# Altium PCB NANO33BLE.PcbDoc (part 2 of 2)
Units mm, origin at the board's own origin, x right, y up, seen from the top; angles counter-clockwise.
Board outline 43.18 x 17.78 mm, 4 copper layers (TOP, GND, SIG, BOTTOM), stack 1.586 mm thick; 73 components, 66 nets, 343 pads, 193 vias.
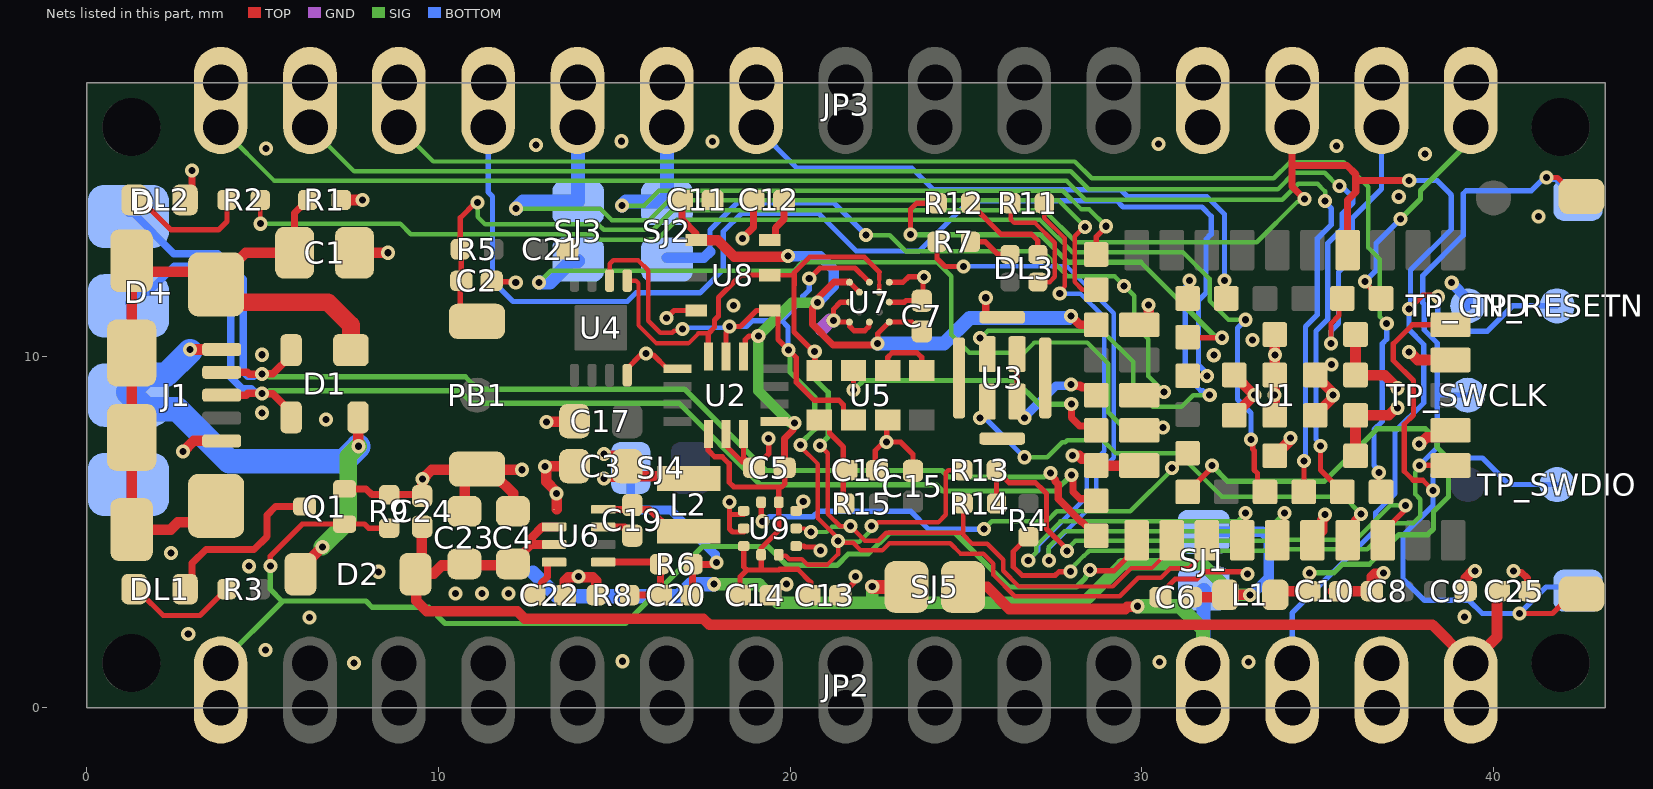
[diagram p4: the nets of this part, all layers, seen from the top]

## Via types
v1: diameter 0.4, hole 0.2, TOP to BOTTOM, tented both sides, 193 vias

## Nets (pads, with @x,y where several pads share a name; then routed paths per layer and width w, separated by ;. In a path a pad name is that pad's centre, name@x,y a point inside that pad or via, vN(x,y) a via of type N, cw(c..) or ccw(c..) an arc to the next point about the centre after c; other vN are vias at no path point) (continued)
D6~: JP3.9 U1.41 | length 16.8
  TOP w0.15: v1(32.352,12.149) 32.352,11.69 U1.41@32.402,11.64
  BOTTOM w0.15: JP3.9@19.035,16.51 20.202,15.343 23.461,15.343 24.073,14.732 29.398,14.732 29.591,14.538 31.847,14.538 32.352,14.034 v1(32.352,12.149)
D7: JP3.10 SJ2.2 U1.47 | length 18.9
  TOP w0.127: JP3.10@16.403,16.418 JP3.10@16.495,16.51
  TOP w0.15: U1.47@28.702,12.89 28.702,13.392 28.986,13.676 v1(28.986,13.694)
  SIG w0.127: v1(15.216,14.283) 15.853,14.283 16.274,14.704 27.753,14.704 28.285,14.172 28.508,14.172 v1(28.986,13.694)
  BOTTOM w0.4: v1(15.216,14.283) 15.333,14.4 SJ2.2@16.5,14.4 ; JP3.10@16.495,16.51 16.498,16.507 SJ2.2@16.498,14.402
D8: JP3.11 SJ3.2 U1.48 | length 23.2
  TOP w0.127: v1(28.387,13.678) 28.359,13.678 28.091,13.41 28.091,12.109 28.311,11.89 U1.48@28.702,11.89
  SIG w0.127: v1(12.205,14.195) 14.605,14.195 14.931,13.869 15.992,13.869 16.55,14.427 27.639,14.427 v1(28.387,13.678)
  BOTTOM w0.4: v1(12.205,14.195) 12.41,14.4 13.975,14.4 13.965,14.41 13.965,16.5 JP3.11@13.955,16.51
D9~: JP3.12 U1.44 | length 33.3
  TOP w0.15: U1.44@31.302,9.44 v1(31.852,9.44)
  BOTTOM w0.15: JP3.12@11.415,16.51 11.415,14.665 11.539,14.541 11.539,12.135 12.121,11.553 15.371,11.553 15.622,11.804 16.781,11.804 16.784,11.8 17.441,11.8 18.098,12.457 18.098,13.535 18.623,14.06 18.775,14.06 20.814,14.06 21.883,12.991 23.672,12.991 25.1,14.419 29.287,14.419 29.467,14.238 31.712,14.238 31.973,13.978 31.973,13.468 31.826,13.321 31.826,11.791 31.615,11.58 31.615,9.745 31.852,9.508 v1(31.852,9.44)
D10~: JP3.13 U1.36 | length 37.8
  TOP w0.15: v1(36.738,6.687) 36.738,6.204 U1.36@36.802,6.14
  SIG w0.127: JP3.13@8.875,16.51 9.851,15.535 14.359,15.535 16.091,15.535 28.098,15.535 28.576,15.056 33.755,15.056 34.212,15.513 35.741,15.513 36.438,14.816 36.438,13.088 36.765,12.761 36.765,11.127 v1(36.964,10.928)
  BOTTOM w0.15: v1(36.738,6.687) 36.738,6.755 36.599,6.893 36.599,7.911 36.839,8.15 36.839,10.359 36.964,10.484 v1(36.964,10.928)
GND: C1.1 C2.2 C3.1 C4.1 C5.2 C6.2 C7.1 C8.1 C9.2 C10.2 C11.2 C12.2 C13.2 C14.2 C15.1 C16.1 C17.1 C21.1 C22.1 C23.1 C24.2 C25.1 DL2.C J1.5 JP2.14 JP3.4 pad.USB_P@1.189,6.35 PB1.1 Q1.S R1.1 R8.1 R9.1 TP_GND.X U1.6 U1.12 U1.14 U1.26 U1.30 U1.53 U1.GND1 U1.GND2 U1.GND3 U1.GND4 U1.GND5 U1.GND6 U1.GND7 U1.GND8 U1.GND9 U1.GND10 U1.GND11 U1.GND12 U2.1 U2.6 U2.7 U3.5 U4.4 U5.6 U6.1 U7.A5 U7.C1 U7.C5 U7.E1 U7.E3 U8.6 U9.3 U9.5 U9.8 U9.9 | length 63.3
  TOP w0.15: C2.2@11.52,12.14 11.545,12.115 12.175,12.115 v1(12.2,12.09) ; U4.4@15.37,9.46 15.37,9.65 15.751,10.031 15.851,10.031 v1(15.899,10.079) 15.947,10.031 16.117,10.031 16.508,9.64 U2.1@17.002,9.64 ; v1(16.48,11.079) 16.702,11.3 U8.6@17.027,11.3 ; U2.6@18.177,7.79 18.227,7.74 18.227,7.405 18.639,6.993 C5.2@18.811,6.993 ; v1(18.28,5.85) 18.277,5.848 18.277,5.507 ; U2.7@18.678,7.79 18.678,7.127 C5.2@18.811,6.993 ; U9.9@18.682,5 18.365,5 18.277,5.088 18.277,5.507 ; U9.8@18.682,5.5 18.284,5.5 18.277,5.507 ; C5.2@18.878,6.993 C5.2@18.811,6.993 ; v1(19.391,7.664) 19.391,7.216 19,6.825 C5.2@18.977,6.825 18.977,6.827 C5.2@18.811,6.993 ; C14.2@19.447,3.205 19.513,3.205 19.776,3.468 19.853,3.468 v1(19.901,3.516) ; U9.3@20.172,4.6 20.396,4.6 20.421,4.575 20.702,4.575 20.801,4.476 v1(20.869,4.476) ; U9.5@20.172,5.6 20.197,5.6 20.327,5.73 20.327,5.817 v1(20.375,5.865) ; C13.2@21.426,3.205 21.451,3.205 21.812,3.566 21.812,3.684 v1(21.86,3.732) ; U7.E1@21.687,10.97 21.274,10.97 v1(21.232,11.012) 21.232,11.333 21.434,11.535 U7.C1@21.688,11.535 ; U7.E1@21.688,10.969 21.688,10.854 21.82,10.721 22.121,10.721 22.244,10.844 U7.E3@22.244,10.959 ; U7.E3@22.231,10.959 U7.E3@22.244,10.959 ; U7.E3@22.254,10.969 U7.E3@22.244,10.959 ; C16.1@22.423,6.825 22.423,7.315 22.617,7.508 22.629,7.508 22.677,7.557 23.144,7.557 23.494,7.207 C15.1@23.494,6.74 ; v1@22.75,7.557 22.75,8.167 U5.6@22.774,8.19 ; U7.C5@22.82,11.535 23.247,11.535 23.297,11.585 23.735,11.585 C7.1@23.745,11.575 23.779,11.609 23.779,12.221 v1(23.813,12.255) 23.366,12.255 23.212,12.101 U7.A5@22.82,12.101 ; U1.53@28.677,6.915 U1.53@28.702,6.89 ; C6.2@30.53,3.148 30.723,3.341 30.723,3.435 30.951,3.663 31.56,3.663 31.77,3.873 32.953,3.873 v1@33.009,3.816
  TOP w0.2: DL2.C@3,14.44 v1(3,15.275) ; Q1.S@7.335,6.225 7.944,6.225 8.109,6.06 R9.1@8.6,6.06 9.546,6.06 9.548,6.06 9.546,6.061 9.544,6.064 9.544,6.504 9.546,6.507 v1(9.548,6.508) ; v1(18.65,13.35) 18.65,13.357 18.957,13.664 C12.2@18.957,14.44 ; U3.5@25.563,11.149 v1@25.563,11.645 ; U3.5@25.755,11.106 U3.5@26.23,11.106 ; v1(40.57,3.89) 40.608,3.852 40.799,3.852 40.961,3.69 C25.1@40.961,3.309
  TOP w0.3: v1(2.74,7.287) 3.043,7.59 J1.5@3.84,7.59 ; R1.1@7.24,14.44 v1(7.84,14.44) ; C1.1@7.615,12.94 v1(8.565,12.94) ; C24.2@9.54,5.92 C24.2@9.55,5.91 ; C24.2@9.546,5.949 9.546,6.06 9.546,6.061 v1@9.546,6.507 ; v1(9.548,6.508) 9.81,6.77 11.088,6.77 10.745,6.427 10.745,5.565 10.74,5.57 C23.1@10.74,5.58 ; PB1.1@11.1,6.775 11.633,6.775 PB1.1@11.633,6.77 ; C4.1@12.12,5.57 12.13,5.56 C4.1@12.13,5.55 ; C4.1@12.125,5.57 12.125,6.097 11.633,6.589 PB1.1@11.633,6.77 ; v1(12.38,6.77) PB1.1@11.633,6.77 ; v1(13.073,8.127) 13.084,8.139 13.859,8.139 C17.1@13.87,8.15 ; 13.365,5.645 v1(13.365,6.095) 13.365,6.145 13.356,6.145 13.065,6.435 13.065,6.831 v1(13.037,6.859) 13.042,6.865 13.865,6.865 C3.1@13.87,6.87 ; C22.1@13.6,3.125 C22.1@13.6,3.205 13.6,3.618 13.697,3.715 14.392,3.715 14.49,3.617 R8.1@14.49,3.205 R8.1@14.49,3.125 ; v1(28.031,7.181) 28.051,7.162 28.224,7.162 28.295,7.09 28.502,7.09 U1.53@28.677,6.915 ; U1.53@28.702,6.89 U1.30@29.927,6.89 ; U1.26@29.927,10.89 29.997,10.89 30.197,11.09 v1(30.197,11.451) ; U1.GND12@32.622,9.465 U1.GND12@32.627,9.465 v1(33.202,8.89) U1.GND11@32.627,8.315 ; U1.GND7@33.777,7.165 34.227,7.615 v1(34.227,7.677) ; U1.GND8@33.777,8.315 v1(33.777,8.89) U1.GND9@33.777,9.465 33.783,9.471 v1(33.783,10.039) 33.783,10.609 U1.GND10@33.777,10.615 ; U1.6@34.852,4.765 35.127,5.04 35.127,5.339 35.213,5.425 v1(35.213,5.493) ; U1.GND5@34.927,8.315 35.434,8.822 v1(35.434,8.889) 35.386,8.937 35.386,9.006 U1.GND6@34.927,9.465 ; C10.2@35.435,3.312 35.439,3.316 36.536,3.316 C8.1@36.54,3.32 ; U1.GND1@36.077,7.165 U1.GND2@36.077,8.315 37.025,8.315 37.242,8.532 v1(37.269,8.532) ; U1.GND4@36.077,10.615 U1.GND3@36.077,9.465 36.087,9.455 36.903,9.455 v1(37.271,9.087) ; C8.1@36.47,3.39 C8.1@36.54,3.32 ; C8.1@36.542,3.322 C8.1@36.54,3.32 ; v1(36.87,3.84) 36.845,3.815 36.628,3.815 36.54,3.727 C8.1@36.54,3.32 ; v1(37.593,10.117) 37.62,10.117 37.847,9.89 U1.14@38.777,9.89 ; v1(37.888,7.509) 37.915,7.509 38.096,7.69 38.564,7.69 U1.12@38.77,7.897 ; C9.2@39.21,3.32 39.21,3.685 v1@39.415,3.89
  GND w0.4: 20.9,10.775 21.137,11.012 v1(21.232,11.012)
  BOTTOM w0.3: v1@38.806,12.082 39.268,11.619 TP_GND.X@39.268,11.43
  other v1: 7.6,1.275 15.23,1.325 30.498,1.309 33.038,1.309 5.088,1.647 2.889,2.102 6.342,2.564 39.17,2.59 10.49,3.249 11.24,3.249 11.99,3.249 13.99,3.733 33,3.8 8.294,3.869 39.47,3.89 4.611,4.027 2.4,4.4 22.745,7.557 6.8,8.2 4.99,8.39 35.393,9.765 4.99,10.04 32.047,10.026 33.144,10.465 18.393,11.437 25.563,11.661 38.812,12.087 41.283,13.974 37.306,14.533 38.053,15.746 5.1,15.9 35.534,15.97 12.771,16.002 30.48,16.037 15.21,16.11 17.8,16.1
INT_APDS: U1.52 U5.2 | length 8.2
  TOP w0.15: v1(21.801,9.042) U5.2@21.801,9.588 ; U5.2@22.001,9.588 U5.2@22.004,9.59
  TOP w0.2: v1(27.995,8.635) 27.995,8.252 28.227,8.02 28.572,8.02 U1.52@28.702,7.89
  SIG w0.15: v1@21.896,9.122 22.085,9.311 26.401,9.311 27.077,8.635 v1(27.995,8.635)
LB: R12.1 U1.43 | length 12.6
  TOP w0.15: v1(23.425,13.454) 23.425,14.175 23.6,14.35 R12.1@24.18,14.35 ; U1.43@31.302,10.54 31.318,10.524 v1(32.286,10.524)
  SIG w0.15: v1(23.425,13.454) 27.117,13.454 27.9,12.671 29.971,12.671 32.07,10.572 32.238,10.572 v1(32.286,10.524)
LG: R11.1 U1.4 | length 19.9
  TOP w0.127: R11.1@27.23,14.35 27.23,13.93 27.814,13.346 27.814,11.989 27.668,11.843 v1(27.668,11.778)
  TOP w0.15: U1.4@32.852,4.765 32.952,4.865 v1(32.952,5.535)
  SIG w0.127: v1(26.772,4.19) 27.004,4.422 27.004,4.615 27.688,5.299 32.717,5.299 v1(32.952,5.535)
  BOTTOM w0.127: v1(26.772,4.19) 27.054,4.472 27.054,4.622 28.431,5.999 28.431,6.797 28.93,7.296 28.93,11.104 28.255,11.778 v1(27.668,11.778)
LPS22HBTR_INT1: U1.46 U9.7 | length 13.8
  TOP w0.15: U9.7@19.177,5.745 19.177,5.343 v1(19.215,5.305) ; v1(30.861,6.82) 30.882,6.82 U1.46@31.302,7.24
  SIG w0.127: v1(25.514,5.091) 25.731,5.308 27.305,5.308 27.583,5.587 29.674,5.587 30.861,6.773 v1(30.861,6.82)
  BOTTOM w0.15: v1(19.215,5.305) 19.282,5.305 19.413,5.436 20.656,5.436 20.814,5.594 23.424,5.594 23.94,5.078 25.501,5.078 v1(25.514,5.091)
LR: R7.1 U1.5 | length 22.3
  TOP w0.15: R7.1@24.18,13.25 24.18,12.773 24.403,12.55 v1(24.93,12.55) ; U1.5@33.852,4.765 34.052,4.965 v1(34.052,5.535)
  SIG w0.127: v1(27.36,4.186) 27.36,4.58 27.802,5.022 33.54,5.022 v1(34.052,5.535)
  BOTTOM w0.127: v1(24.93,12.55) 27.876,12.55 29.207,11.219 29.207,7.115 28.708,6.616 28.708,5.884 27.36,4.536 v1(27.36,4.186)
MIC_PWR: U1.51 U3.1 U3.2 | length 4.4
  TOP w0.15: U3.1@26.455,8.706 U3.2@26.455,10.056
  TOP w0.25: U3.1@26.455,8.706 26.455,8.436 26.645,8.246 v1(26.665,8.246) ; v1(27.99,9.19) 28.019,9.161 28.248,9.161 28.294,9.115 28.477,9.115 U1.51@28.702,8.89
  BOTTOM w0.25: v1@26.672,8.272 27.561,9.161 27.961,9.161 v1(27.99,9.19)
MISO~: JP3.15 U1.34 | length 41.5
  TOP w0.15: U1.34@34.602,6.14 34.609,6.147 v1(34.609,7.016)
  SIG w0.127: JP3.15@3.81,16.51 5.339,14.981 14.589,14.981 15.861,14.981 27.868,14.981 28.4,14.449 33.996,14.449 34.445,14.898 34.996,14.898 35.211,14.683 35.211,14.411 v1(35.214,14.408)
  BOTTOM w0.15: v1(34.609,7.016) 34.652,7.058 34.652,10.84 34.991,11.179 34.991,13.34 35.39,13.739 35.39,14.196 35.214,14.372 v1(35.214,14.408)
MOSI: JP3.14 U1.35 | length 40
  TOP w0.15: v1(35.082,7.441) 35.082,6.76 U1.35@35.702,6.14
  SIG w0.127: JP3.14@6.35,16.51 7.603,15.258 14.474,15.258 15.976,15.258 27.983,15.258 28.492,14.749 33.872,14.749 34.336,15.213 35.201,15.213 35.581,14.834 v1(35.617,14.834)
  BOTTOM w0.15: v1(35.082,7.441) 35.082,7.509 34.952,7.638 34.952,10.716 35.291,11.055 35.291,13.216 35.69,13.615 35.69,14.05 36,14.36 36,14.509 35.676,14.834 v1(35.617,14.834)
NetC3_2: C3.2 C20.2 L2.2 R6.2 SJ4.1 | length 10
  TOP w0.2: v1(14.71,6.52) C3.2@15.37,6.52 ; v1(14.71,7.22) C3.2@15.37,7.22 ; C20.2@17.22,3.225 17.22,4.08 17.242,4.058 17.266,4.082 17.802,4.082 17.851,4.131 v1(17.905,4.131)
  TOP w0.25: C3.2@15.37,6.87 15.661,6.579 C3.2@15.729,6.579
  TOP w0.3: C3.2@15.729,6.579 17.111,6.579 L2.2@17.17,6.52
  BOTTOM w0.2: v1(14.71,6.52) SJ4.1@15.17,6.52 ; v1(14.71,7.22) 14.717,7.213 SJ4.1@15.077,7.213
  BOTTOM w0.25: SJ4.1@15.47,6.82 15.47,5.773 15.616,5.627 16.606,5.627 17.876,4.356 17.876,4.16 v1(17.905,4.131)
NetC10_1: C10.1 L1.2 U1.31 | length 16.8
  TOP w0.15: U1.31@31.302,6.14 31.997,6.836 v1(31.997,6.888) ; L1.2@33.798,3.213 L1.2@33.897,3.312 ; C10.1@34.765,3.312 34.767,3.315 34.767,3.837 v1(34.77,3.84)
  TOP w0.3: L1.2@33.897,3.312 C10.1@34.765,3.312
  SIG w0.15: v1(31.997,6.888) 32.441,6.444 35.195,6.444 36.684,7.934 38.064,7.934 38.4,7.598 38.4,7.401 38.717,7.084 38.717,6.002 38.291,5.576 38.291,5.089 38.127,4.925 37.313,4.925 36.809,4.42 36.806,4.42 36.468,4.083 35.709,4.083 35.466,3.84 v1(34.77,3.84)
NetC12_1: C12.1 U8.3 | length 1.4
  TOP w0.2: U8.3@19.35,13.266 19.474,13.266 19.582,13.375 19.582,13.649 19.827,13.894 C12.1@19.827,14.44
NetC16_2: C16.2 R15.1 U5.8 | length 2.4
  TOP w0.15: U5.8@21.034,8.05 21.119,7.965 21.119,7.814 21.514,7.419 R15.1@21.514,5.86
NetC19_1: C19.1 L2.1 U6.8 | length 3
  TOP w0.2: U6.8@14.615,5.645 15.345,5.645 15.515,5.815 15.695,5.635 16.005,5.635 16.62,5.02 L2.1@17.17,5.02
NetC19_2: C19.2 U6.7 | length 1
  TOP w0.2: U6.7@14.615,5.145 15.313,5.145 15.513,4.945 C19.2@15.515,4.945
NetC20_1: C20.1 R6.1 R8.2 U6.5 | length 3.4
  TOP w0.2: U6.5@14.615,4.145 R6.1@16.23,4.145 ; R8.2@15.44,3.205 C20.1@16.33,3.205 ; R6.1@16.29,4.085 16.31,4.065 C20.1@16.31,3.225
NetC22_2: C22.2 U6.4 | length 1.2
  TOP w0.2: C22.2@12.73,3.205 12.914,3.389 12.914,3.541 13.098,3.726 13.098,4.12 13.123,4.145 U6.4@13.177,4.145
NetDL1_A: DL1.A R3.1 | length 3.1
  TOP w0.15: DL1.A@1.55,3.375 1.55,3.253 2.176,2.626 3.223,2.626 3.972,3.375 R3.1@3.99,3.375
NetDL1_C: DL1.C Q1.D | length 5
  TOP w0.2: DL1.C@3,3.375 3,4.111 3.391,4.503 4.761,4.503 5.124,4.866 5.124,5.477 5.372,5.725 Q1.D@6.195,5.725
NetDL2_A: DL2.A R2.1 | length 3.5
  TOP w0.15: DL2.A@1.55,14.44 1.55,14.422 1.827,14.145 1.845,14.145 2.398,13.592 3.75,13.592 3.99,13.832 R2.1@3.99,14.44
NetDL3_2: DL3.2 R7.2 | length 1.3
  TOP w0.15: R7.2@25.13,13.25 25.555,13.25 25.91,12.895 DL3.2@26.255,12.895
NetDL3_3: DL3.3 R12.2 | length 2.8
  TOP w0.15: R12.2@25.13,14.35 25.13,14.335 26,13.465 26.861,13.465 27.045,13.282 DL3.3@27.045,12.895
NetDL3_4: DL3.4 R11.2 | length 3.5
  TOP w0.127: R11.2@26.28,14.35 26.28,13.874 26.368,13.787 26.964,13.787 27.528,13.222 27.528,12.255 27.378,12.105 DL3.4@27.045,12.105
NetJP2_12: JP2.12 SJ1.2 SJ5.2 | length 10.5
  TOP w0.3: SJ5.2@24.87,3.439 25.608,3.439 26.237,2.81 29.528,2.81 29.588,2.87 29.856,2.87 v1(29.875,2.889)
  SIG w0.4: v1(29.875,2.889) 31.072,2.889 31.735,2.227 JP2.12@31.735,1.27
  BOTTOM w0.4: JP2.12@31.75,1.27 31.756,1.276 31.756,3.344 SJ1.2@31.762,3.35
NetR2_2: R2.2 U1.33 | length 36
  TOP w0.127: v1(4.94,13.765) R2.2@4.94,14.44
  TOP w0.15: v1(33.105,7.631) 33.152,7.584 33.152,7.36 33.195,7.317 33.195,6.766 33.29,6.671 33.29,6.352 U1.33@33.502,6.14
  SIG w0.127: v1(4.94,13.765) 8.923,13.765 9.219,13.469 14.431,13.469 14.585,13.315 16.222,13.315 16.779,13.873 27.106,13.873 28.019,12.959 31.165,12.959 31.927,12.197 31.927,11.573 32.465,11.035 v1(32.952,11.035)
  BOTTOM w0.15: v1(32.952,11.035) 32.719,10.802 32.719,8.772 33.105,8.386 v1(33.105,7.631)
NetSJ2_1: SJ2.1 U1.28 | length 19.2
  TOP w0.2: U1.28@29.927,8.89 29.981,8.944 30.599,8.944 v1(30.637,8.983)
  SIG w0.127: v1(22.157,13.44) 22.835,13.44 23.292,12.983 27.179,12.983 27.888,12.275 29.225,12.275 v1(29.5,12) 29.783,11.717 29.783,10.891 30.19,10.485 30.19,9.43 v1(30.637,8.983)
  BOTTOM w0.15: 17.723,12.971 17.723,13.585 18.504,14.365 21.232,14.365 v1(22.157,13.44)
  BOTTOM w0.3: SJ2.1@16.5,12.795 17.547,12.795 17.723,12.971
NetSJ3_1: SJ3.1 U1.29 | length 24.1
  TOP w0.15: U1.29@29.927,7.89 30.007,7.97 v1(30.599,7.97)
  SIG w0.127: v1(12.856,12.089) 13.198,12.431 20.113,12.431 20.35,12.669 24.184,12.669 24.58,12.273 24.58,10.613 25.091,10.102 26.663,10.102 26.948,10.388 28.447,10.388 29.045,9.79 29.045,8.405 29.119,8.331 29.596,7.854 30.024,7.854 30.141,7.97 v1(30.599,7.97)
  BOTTOM w0.4: v1(12.856,12.089) 13.167,12.089 13.778,12.7 SJ3.1@13.975,12.7
NetU5_3: U5.3 U5.4 | length 1.8
  TOP w0.15: U5.3@22.774,9.59 22.774,9.965 22.905,10.097 23.612,10.097 23.744,9.965 U5.4@23.744,9.59
PDMCLK: U1.42 U3.3 | length 12.6
  TOP w0.15: v1(25.395,10.516) 25.605,10.306 U3.3@25.605,10.056 ; U1.42@31.302,11.64 31.352,11.69 v1(31.352,12.149)
  SIG w0.127: v1@25.532,10.632 25.626,10.726 28.868,10.726 29.753,9.842 29.753,9.118 30.314,8.558 31.129,8.558 31.462,8.891 v1(31.931,8.891)
  BOTTOM w0.15: v1(31.352,12.149) 31.352,12.081 31.236,11.965 31.236,9.455 31.676,9.015 31.74,9.015 31.864,8.891 v1(31.931,8.891)
PDMDIN: U1.7 U3.4 | length 13.7
  TOP w0.15: v1(25.395,8.246) 25.605,8.456 U3.4@25.605,8.706
  TOP w0.2: U1.7@35.852,4.765 36.046,4.959 36.046,5.334 v1(36.228,5.516)
  SIG w0.127: v1(26.659,7.125) 27.31,7.125 27.74,7.555 27.821,7.555 27.879,7.613 28.888,7.613 29.268,7.233 31.049,7.233 32.275,6.007 35.737,6.007 v1(36.228,5.516)
  BOTTOM w0.15: v1@25.555,8.23 v1(26.659,7.125)
R_PULLUP: R13.2 R14.2 U1.8 | length 15.9
  TOP w0.15: R13.2@25.863,6.76 R13.2@25.867,6.757 ; R14.2@25.87,5.81 25.867,5.813 R13.2@25.867,6.757 ; v1@27.875,4.51 27.87,4.51 27.294,5.086 27.294,6.096 27.125,6.265 27.114,6.265 26.978,6.401 26.222,6.401 R13.2@25.867,6.757 ; U1.8@36.852,4.765 36.852,4.99 37.446,5.584 37.446,5.709 v1(37.494,5.757)
  SIG w0.127: v1@27.875,4.51 28.11,4.745 33.864,4.745 33.903,4.784 36.097,4.784 37.07,5.757 v1(37.494,5.757)
  other v1: 27.875,4.46
RESETN: C2.1 JP2.13 JP3.3 PB1.2 R5.1 TP_RESETN.X U1.19 | length 59.4
  TOP w0.15: C2.1@10.625,12.14 10.625,11.402 PB1.2@11.037,10.99 ; R5.1@10.625,13.04 10.625,13.935 11.055,14.365 v1(11.114,14.365) ; C2.1@10.65,12.14 R5.1@10.65,13.04 ; v1(37.594,11.341) 37.991,11.738 38.369,11.738 v1(38.417,11.69)
  TOP w0.2: JP3.3@34.275,16.51 34.521,16.264 34.275,16.017 34.275,15.418 ; v1(34.621,14.473) 34.275,14.819 34.275,15.418 ; U1.19@35.852,13.015 35.852,14.432 36.083,14.663 36.083,14.917 ; v1(37.604,14.995) 36.161,14.995 36.083,14.917 ; 34.275,15.418 35.836,15.418 36.083,15.171 36.083,14.917
  SIG w0.127: v1(11.114,14.365) 11.114,13.967 11.336,13.746 14.546,13.746 14.7,13.592 16.107,13.592 16.665,14.15 27.221,14.15 28.134,13.236 33.266,13.236 34.413,14.383 34.458,14.383 34.547,14.473 v1(34.621,14.473)
  BOTTOM w0.15: JP2.13@34.275,1.27 34.275,2.695 36.653,5.073 36.653,5.547 37.2,6.094 37.2,7.855 38.018,8.673 38.018,10.33 37.594,10.754 v1(37.594,11.341) 37.642,11.389 37.642,12.447 38.798,13.602 38.798,14.566 38.78,14.584 38.78,14.612 38.397,14.995 v1(37.604,14.995) ; v1(38.417,11.69) 38.417,11.066 38.778,10.705 39.82,10.705 40.545,11.43 TP_RESETN.X@41.808,11.43
RX: JP3.2 U1.38 | length 8.2
  TOP w0.15: v1(35.377,10.36) 35.377,10.922 35.607,11.153 35.607,11.546 U1.38@35.702,11.64
  BOTTOM w0.15: v1(35.377,10.36) 35.377,10.716 35.591,10.93 35.591,12.392 35.99,12.792 35.99,13.926 36.815,14.75 JP3.2@36.815,16.51
SCK: JP2.1 Q1.G R9.2 U1.1 | length 35.2
  TOP w0.15: v1(5.223,4.034) 5.223,4.315 6.133,5.225 Q1.G@7.335,5.225 7.899,5.225 8.014,5.11 R9.2@8.6,5.11 ; v1(28.526,3.916) 28.544,3.899 29.211,3.899 29.852,4.54 U1.1@29.852,4.765
  SIG w0.15: JP2.1@3.81,1.27 5.578,3.038 7.941,3.038 8.117,2.862 9.727,2.862 10.192,2.397 15.322,2.397 17.512,4.586 19.376,4.586 19.911,4.051 21.33,4.051 21.654,4.375 22.224,4.375 22.822,4.973 24.691,4.973 26.225,3.439 28.141,3.439 28.397,3.695 28.397,3.719 28.526,3.849 v1(28.526,3.916) ; v1(5.223,4.034) 5.223,3.363 5.563,3.023
SCL1: R13.1 U1.3 U2.13 U4.6 U5.7 U7.A3 U8.1 U9.2 | length 44.7
  TOP w0.127: U4.6@14.87,12.15 14.87,12.63 14.97,12.73 15.678,12.73 15.967,12.441 15.967,11.007 16.309,10.665 16.652,10.665 16.709,10.722 16.886,10.722 v1(16.939,10.774) ; U9.2@19.677,4.355 19.706,4.326 19.88,4.326 19.977,4.229 20.338,4.229 20.504,4.062 21.052,4.062 21.363,4.374 v1@21.363,4.691 ; v1(20.293,7.47) 20.293,7.433 20.793,6.933 20.793,5.389 21.254,4.929 21.254,4.924 21.363,4.814 v1(21.363,4.74) 21.412,4.691 21.798,4.691 22.013,4.475 22.618,4.475 22.825,4.682 24.551,4.682 24.846,4.388 25.49,4.388 25.781,4.096 25.781,3.78 26.387,3.174 29.377,3.174 29.903,3.699 30.545,3.699 30.809,3.963 31.327,3.963 31.577,4.213 31.577,4.49 U1.3@31.852,4.765 ; v1(22.315,5.169) 22.389,5.169 22.501,5.281 24.218,5.281 24.425,5.488 24.425,6.686 24.499,6.76 R13.1@25.013,6.76
  TOP w0.15: U2.13@18.177,9.99 18.177,10.672 18.279,10.774 v1(18.279,10.841) 18.588,10.841 19.047,11.3 19.557,11.3 19.657,11.2 19.657,10.475 20.177,9.955 20.177,9.255 20.685,8.747 21.387,8.747 21.519,8.616 21.519,8.415 21.744,8.19 U5.7@21.775,8.19 ; v1(20.545,12.205) 20.847,12.507 21.848,12.507 U7.A3@22.254,12.101 ; U5.7@21.975,8.19 U5.7@22.004,8.19
  SIG w0.127: v1(21.363,4.74) 21.387,4.717 21.965,4.717 22.263,5.014 22.263,5.117 v1(22.315,5.169)
  SIG w0.15: v1(19.953,10.179) 19.999,10.133 19.999,9.541 20.698,8.841 20.698,8.602 20.7,8.6 20.7,7.921 20.293,7.513 v1(20.293,7.47)
  BOTTOM w0.127: v1(16.939,10.774) 16.972,10.808 18.245,10.808 v1(18.279,10.841)
  BOTTOM w0.15: v1(18.279,10.841) 18.762,10.841 18.931,11.01 19.705,11.01 19.763,11.01 ; v1(19.953,10.179) 19.943,10.189 19.943,10.829 19.763,11.01 ; v1(20.545,12.205) 20.545,11.884 20.361,11.7 20.361,11.608 19.763,11.01
SDA1: R14.1 U1.2 U2.14 U4.5 U5.1 U7.B4 U8.2 U9.4 | length 33.9
  TOP w0.108: 22.537,12.028 22.537,12.168
  TOP w0.127: U4.5@15.37,12.15 15.615,12.15 15.69,12.075 15.69,10.873 16.202,10.361 17.11,10.361 17.394,10.645 17.677,10.645 ; U8.2@19.427,12.3 20.12,12.3 ; U9.4@20.172,5.1 20.424,5.1 20.524,5 v1(20.597,5) ; v1(20.846,7.465) 21.075,7.236 21.075,5.514 21.423,5.166 v1(21.719,5.166) 22.129,4.755 22.507,4.755 22.733,4.981 24.92,4.981 ; U7.B4@22.537,11.818 22.537,12.028 ; 22.537,12.168 22.537,12.393 ; R14.1@24.92,5.81 24.92,4.919 25.174,4.665 25.604,4.665 26.058,4.211 26.058,3.894 26.502,3.451 29.171,3.451 29.696,3.976 30.288,3.976 30.852,4.54 U1.2@30.852,4.765
  TOP w0.15: U2.14@17.677,9.99 17.677,10.645 17.854,10.822 17.854,11.029 17.963,11.137 17.963,11.663 18.608,12.308 19.419,12.308 U8.2@19.427,12.3 ; U5.1@20.926,9.59 20.701,9.815 v1(20.701,10.136) 20.665,10.136 20.113,10.689 20.113,12.022 20.12,12.029 20.12,12.3 20.12,12.381 20.56,12.821 22.109,12.821 22.537,12.393
  SIG w0.127: v1(20.597,5) 21.038,5 21.192,5.154 21.706,5.154 v1(21.719,5.166)
  SIG w0.15: v1(20.701,10.136) 20.701,9.803 20.57,9.673 20.57,9.486 21.082,8.974 21.082,7.702 v1(20.846,7.465)
SHIELD: C1.2 D1.1 J1.M1 J1.M2 J1.M3 J1.M4 J1.M5 J1.M6 R1.2 | length 21.2
  TOP w0.2: C1.2@5.915,12.94 5.915,14.072 6.175,14.332 R1.2@6.175,14.44
  TOP w0.3: J1.M2@1.28,12.71 J1.M5@1.28,10.09 J1.M6@1.28,7.69 J1.M3@1.28,5.07 2.39,5.07 2.596,5.276 J1.M4@3.213,5.276 ; J1.M2@1.588,12.402 3.316,12.402 J1.M1@3.68,12.037 3.68,12.091 4.529,12.94 C1.2@5.915,12.94
  TOP w0.5: J1.M1@3.68,12.037 4.181,11.537 6.863,11.537 7.515,10.885 D1.1@7.515,10.17
SWCLK: pad.JTAG_PAD@42.403,14.444 pad.JTAG_PAD@42.503,14.544 R4.1 TP_SWCLK.X U1.11 | length 29.6
  TOP w0.15: R4.1@26.779,4.86 26.764,4.86 26.347,4.443 26.347,4.014 26.6,3.761 27.536,3.761 27.647,3.871 v1(27.972,3.871) ; v1(37.895,6.897) 38.77,6.897 U1.11@38.777,6.89 ; v1(41.511,15.079) 41.818,15.079 42.253,14.644 pad.JTAG_PAD@42.303,14.644
  SIG w0.127: v1(27.972,3.871) 27.972,3.941 28.113,4.082 28.113,4.087 28.355,4.33 28.368,4.33 28.507,4.468 34.011,4.468 34.05,4.507 36.41,4.507 37.158,5.255 37.72,5.255 37.919,5.454 37.919,5.933 37.772,6.08 37.772,6.705 37.895,6.829 v1(37.895,6.897)
  BOTTOM w0.15: v1(37.895,6.897) 38.4,7.401 38.4,8.892 ; TP_SWCLK.X@39.266,8.892 38.4,8.892 ; pad.JTAG_PAD@42.003,14.644 42.003,14.793 41.795,15.001 41.795,15.03 41.628,15.03 41.579,15.079 41.453,15.079 41.08,14.707 39.228,14.707 39.14,14.619 39.14,13.44 37.992,12.292 37.992,11.514 38.032,11.474 38.032,10.741 38.4,10.372 38.4,8.892
SWDIO: pad.JTAG_PAD@42.403,3.336 pad.JTAG_PAD@42.503,3.236 TP_SWDIO.X U1.15 | length 21.7
  TOP w0.15: v1(38.277,6.183) 37.988,6.472 37.719,6.472 37.463,6.728 37.463,8.065 37.723,8.325 37.723,9.307 37.149,9.881 37.149,10.349 37.69,10.89 U1.15@38.777,10.89 ; v1(40.743,2.681) 41.676,2.681 42.131,3.136 pad.JTAG_PAD@42.303,3.136
  BOTTOM w0.15: TP_SWDIO.X@41.808,6.35 40.441,6.35 39.686,7.105 38.745,7.105 38.277,6.637 v1(38.277,6.183) 38.277,5.758 37.427,4.908 37.427,3.665 38.035,3.056 39.305,3.056 39.68,2.681 v1(40.743,2.681) 41.498,3.436 pad.JTAG_PAD@42.403,3.436
TX: JP3.1 U1.37 | length 6.3
  TOP w0.15: v1(36.351,12.127) 36.351,12.091 U1.37@36.802,11.64
  SIG w0.15: v1(37.352,13.899) 37.922,14.469 37.922,14.712 39.355,16.146 JP3.1@39.355,16.51
  BOTTOM w0.15: v1(36.351,12.127) 36.657,12.433 36.657,13.204 v1(37.352,13.899)
USB_N: D1.2 D-.X J1.2 pad.USB_N U1.55 | length 35.4
  TOP w0.21: J1.2@3.84,9.54 4.574,9.54 4.624,9.49 v1(4.99,9.49) 5,9.5 5.295,9.5 D1.2@5.815,10.02 ; v1(27.399,6.681) 27.399,6.629 27.544,6.485 27.544,6.435 27.624,6.355 27.624,5.944 28.283,5.285 28.307,5.285 U1.55@28.702,4.89
  SIG w0.15: v1@5.038,9.442 5.176,9.442 5.203,9.415 10.765,9.415 11.117,9.063 17,9.063 19.315,6.747 24.315,6.747 24.499,6.563 27.214,6.563 27.332,6.681 v1(27.399,6.681)
  BOTTOM w0.21: pad.USB_N@1.189,14.058 1.335,14.058 2.476,12.916 3.722,12.916 4.455,12.184 4.455,9.553 4.578,9.43 4.752,9.43 4.775,9.454 4.954,9.454 v1(4.99,9.49)
USB_P: D1.3 D+.X J1.3 pad.USB_P@1.189,11.43 U1.54 | length 35.1
  TOP w0.21: J1.3@3.84,8.89 4.534,8.89 4.584,8.94 v1(4.99,8.94) 5,8.93 5.295,8.93 D1.3@5.815,8.41 ; v1(27.999,6.623) 28.044,6.578 28.044,6.143 28.247,5.94 28.651,5.94 U1.54@28.702,5.89
  SIG w0.15: v1@5.038,8.988 5.176,8.988 5.203,9.015 10.599,9.015 10.951,8.663 16.834,8.663 19.149,6.347 24.15,6.347 24.334,6.163 27.539,6.163 v1(27.999,6.623)
  BOTTOM w0.21: pad.USB_P@1.189,11.518 1.487,11.816 D+.X@1.783,11.816 ; D+.X@1.783,11.849 2.49,12.556 3.573,12.556 4.095,12.035 4.095,9.404 4.428,9.07 4.682,9.07 4.775,8.976 4.954,8.976 v1(4.99,8.94)
VDD_ENV: C5.1 C7.2 C11.1 C13.1 C14.1 U1.49 U2.5 U2.8 U2.12 U7.A1 U7.B2 U7.E5 U8.4 U9.1 U9.6 U9.10 | length 37.6
  TOP w0.15: U2.5@17.677,7.79 17.677,7.315 17.853,7.139 18.069,7.139 18.27,6.938 18.27,6.412 18.402,6.28 19.669,6.28 ; C14.1@18.577,3.205 18.577,3.726 18.77,3.918 ; U2.12@18.678,9.99 18.723,10.035 18.723,10.465 18.832,10.574 v1(19.096,10.574) ; U9.10@18.682,4.5 18.682,4.006 18.77,3.918 ; U2.8@19.752,8.14 19.773,8.12 20.007,8.12 20.028,8.099 v1(20.123,8.099) ; C5.1@19.847,6.825 19.847,6.368 19.759,6.28 19.669,6.28 ; C13.1@20.589,3.322 20.589,3.57 20.218,3.941 19.709,3.941 19.687,3.918 19.177,3.918 ; U7.A1@21.684,12.105 U7.A1@21.688,12.101 U7.B2@21.971,11.818 ; v1@22.451,10.318 v1(22.489,10.356) 22.489,10.638 U7.E5@22.82,10.969 23.456,10.969 23.505,10.92 23.745,10.92 C7.2@23.745,10.705 ; 18.77,3.918 19.177,3.918 ; 19.177,3.918 U9.1@19.177,4.355 19.177,4.54 19.677,5.04 U9.6@19.677,5.845 19.677,6.273 19.669,6.28
  TOP w0.2: C11.1@16.927,14.44 16.927,13.891 17.327,13.491 U8.4@17.327,13.3 ; C5.1@19.847,6.825 19.843,6.829 19.843,7.656 20.085,7.898 20.085,8.061 v1(20.123,8.099) ; U7.A1@21.684,12.105 21.246,12.105 20.725,11.584 v1(20.786,11.524) 20.635,11.373 20.635,10.907 21.224,10.318 v1@22.451,10.318
  TOP w0.25: v1(27.99,11.14) 28.24,10.89 U1.49@28.702,10.89
  TOP w0.3: U8.4@17.327,13.3 17.939,13.3 18.416,12.823 19.854,12.823 19.857,12.825 19.922,12.825 v1(19.941,12.845)
  SIG w0.3: v1(20.123,8.099) 20.104,8.118 19.988,8.118 19.096,9.011 v1(19.096,10.574) 20.046,11.524 v1(20.786,11.524)
  BOTTOM w0.3: v1(19.941,12.845) 20.855,12.845 21.245,12.455 21.245,11.983 v1(20.786,11.524)
  BOTTOM w0.4: v1(22.489,10.356) 24.379,10.356 25.109,11.086 27.936,11.086 v1(27.99,11.14)
VIN: C4.2 C23.2 C24.1 C25.2 D2.C JP2.15 U6.2 U6.3 | length 40.3
  TOP w0.2: JP2.15@39.355,1.27 JP2.15@39.443,1.358
  TOP w0.25: C4.2@12.12,4.22 12.222,4.22 12.647,4.645 ; U6.3@13.365,4.645 12.647,4.645 ; U6.2@13.365,5.145 12.955,5.145 12.647,4.838 12.647,4.645
  TOP w0.3: D2.C@9.375,3.82 9.524,3.969 9.524,5.034 C24.1@9.54,5.05 ; C4.2@12.12,4.07 12.104,4.054 10.756,4.054 10.74,4.07 10.718,4.048 10.092,4.048 9.865,3.82 9.524,3.82 9.375,3.671 9.375,3.04 9.666,2.749 12.245,2.749 12.461,2.533 17.535,2.533 17.708,2.36 38.265,2.36 39.195,1.43 JP2.15@39.37,1.43 ; JP2.15@39.443,1.358 40.1,2.015 C25.2@40.1,3.3
VUSB: C6.1 D1.4 D2.A J1.1 L1.1 pad.USB_P@1.189,8.89 SJ1.1 SJ5.1 | length 44.7
  TOP w0.3: v1(2.938,10.187) v1(2.938,10.187) 3.838,10.189 J1.1@3.84,10.19 ; D2.A@6.08,3.8 6.08,3.955 v1(6.7,4.575) ; D1.4@7.715,8.26 7.721,8.254 7.721,7.444 v1(7.726,7.438) ; C6.1@31.4,3.148 32.313,3.148 L1.1@32.378,3.213 v1(33.073,3.213)
  TOP w0.4: v1(22.337,3.448) 22.345,3.439 SJ5.1@23.36,3.439
  SIG w0.35: v1(17.836,3.515) 19.124,3.515 19.649,2.99 22.251,2.99 ; v1@22.355,3.429 v1(22.337,3.448) 22.334,3.444 22.334,3.073 22.251,2.99 ; v1(33.073,3.213) 32.606,3.213 31.739,4.08 29.432,4.08 28.342,2.99 22.251,2.99
  SIG w0.5: v1(6.7,4.575) 7.438,5.313 7.438,7.149 v1(7.726,7.438)
  BOTTOM w0.3: SJ1.1@31.762,5.05 31.805,5.007 33.433,5.007 33.608,4.831 33.608,3.701 33.207,3.3 33.187,3.3 33.1,3.213 v1(33.073,3.213)
  BOTTOM w0.4: 12.691,3.851 13.37,3.173 16.836,3.173 17.179,3.515 v1(17.836,3.515)
  BOTTOM w0.7: v1@2.938,10.143 2.262,9.466 1.677,9.466 1.189,8.978 1.675,8.492 2.574,8.492 4.053,7.013 7.316,7.013 7.726,7.423 v1(7.726,7.438)
pads on no net: Fiducial_1.1 Fiducial_2.1 J1.4 U1.13 U1.45 U2.2 U2.3 U2.10 U2.11 U4.1 U4.2 U4.3 U4.7 U4.9 U6.6 U7.D2 U7.D4 U8.5

## Polygon pours and split planes (outlines as drawn)
GND on GND "GND_2" (solid, remove dead copper, pour order 0): 0,17.78 0,0 43.18,0 43.18,17.78
GND on BOTTOM "GND_BOT" (solid, remove dead copper, pour order 4): 0,0 0,17.78 43.18,17.78 43.18,0
VUSB on BOTTOM "VUSB_POL" (solid, remove dead copper, pour order 2): 6.434,4.731 7.143,5.44 16.569,5.44 17.919,4.09 18.87,4.09 19.27,3.89 19.27,3.29 18.995,3.015 6.434,3.015
GND on SIG "GND_3" (solid, remove dead copper, pour order 3): 0,0 0,17.78 43.18,17.78 43.18,0
GND on TOP "GND_TOP" (solid, remove dead copper, pour order 1): 0.091,0.425 0.091,18.205 43.271,18.205 43.271,0.425

## Keep-outs
TOP:
  rectangle: 21.4,10.396 23.6,12.596
GND:
  rectangle: 21.4,10.396 23.6,12.596
SIG:
  rectangle: 21.4,10.396 23.6,12.596
BOTTOM:
  rectangle: 21.4,10.396 23.6,12.596

## Other copper
TOP:
  pour cut-out: 43.162,4.137 39.352,4.137 39.352,13.633 43.162,13.633
GND:
  pour cut-out: 43.162,4.137 39.352,4.137 39.352,13.633 43.162,13.633
SIG:
  pour cut-out: 43.162,4.137 39.352,4.137 39.352,13.633 43.162,13.633
BOTTOM:
  region: 243 vertices and 1 holes, not listed, extent 0.773,3.776 1.811,4.486
  region: 336 vertices and 0 holes, not listed, extent 0.795,2.687 1.791,3.586
  pour cut-out: 43.162,4.137 39.352,4.137 39.352,13.633 43.162,13.633
  pour cut-out: 13.075,14.404 14.915,14.404 14.915,12.596 13.075,12.596
  pour cut-out: 15.597,14.407 17.437,14.407 17.437,12.599 15.597,12.599

## Silkscreen, mask and mechanical layers (free items; w line width, h text height)
Bottom Solder:
  rectangle: 15.394,6.085 17.341,7.555
Top 3D Body:
  the board outline again, w0.01
Route Tool Path:
  lines w2: -1,1 -1,0 ccw(c0,0) 0,-1 43.18,-1 ccw(c43.18,0) 44.18,0 44.18,6.5 ; -1,5 -1,13 ; -1,17 -1,17.78 cw(c0,17.78) 0,18.78 43.18,18.78 cw(c43.18,17.78) 44.18,17.78 44.18,10.5
Board:
  the board outline again, w0.1
Mechanical 5:
  lines w0.1: 0,1.27 1.27,1.27 ; 0,16.51 1.27,16.51 ; 1.27,0 1.27,1.27 ; 1.27,2.54 1.27,1.27 ; 1.27,15.24 1.27,16.51 ; 1.27,17.78 1.27,16.51 ; 2.54,1.27 1.27,1.27 ; 2.54,16.51 1.27,16.51 ; 40.64,1.27 41.91,1.27 ; 40.64,16.51 41.91,16.51 ; 41.91,0 41.91,1.27 ; 41.91,2.54 41.91,1.27 ; 41.91,15.24 41.91,16.51 ; 41.91,17.78 41.91,16.51 ; 43.18,1.27 41.91,1.27 ; 43.18,16.51 41.91,16.51 ; 0,0 0,17.78 43.18,17.78 43.18,0 0,0
SiliconCaseHole:
  lines w0.05: 19.7,6.89 28.7,6.89 28.7,13.89 25.2,13.89 25.2,10.89 19.7,10.89 19.7,6.89
Pin1added (Mech41):
  circle w0.15: c21.449,12.086 r0.05
  circle w0.15: c12.886,6.117 r0.05
  circle w0.15: c13.464,9.106 r0.05
  circle w0.15: c18.35,4 r0.05
  circle w0.15: c20.608,10.198 r0.05
  circle w0.15: c27.719,7.374 r0.05
  circle w0.15: c19.744,10.888 r0.05
  circle w0.15: c25.663,12.081 r0.05
  circle w0.15: c5.216,8.197 r0.05
  lines w0.2: 7.85,3.425 7.85,4.075 ; 1.948,3.121 1.948,3.629 2.202,3.375 1.948,3.121 ; 1.948,14.186 1.948,14.694 2.202,14.44 1.948,14.186 ; 7.15,3.4 7.85,3.75 7.15,4.05 7.15,3.4